# Altium PCB PCB1.PcbDoc
Units mil, origin at the board's own origin, x right, y up, seen from the top; angles counter-clockwise.
Board outline 6000 x 4000 mil, 2 copper layers (Top Layer, Bottom Layer); 60 components, 52 nets, 222 pads, 9 vias.
Unrouted connection lines stored in the file: 116.
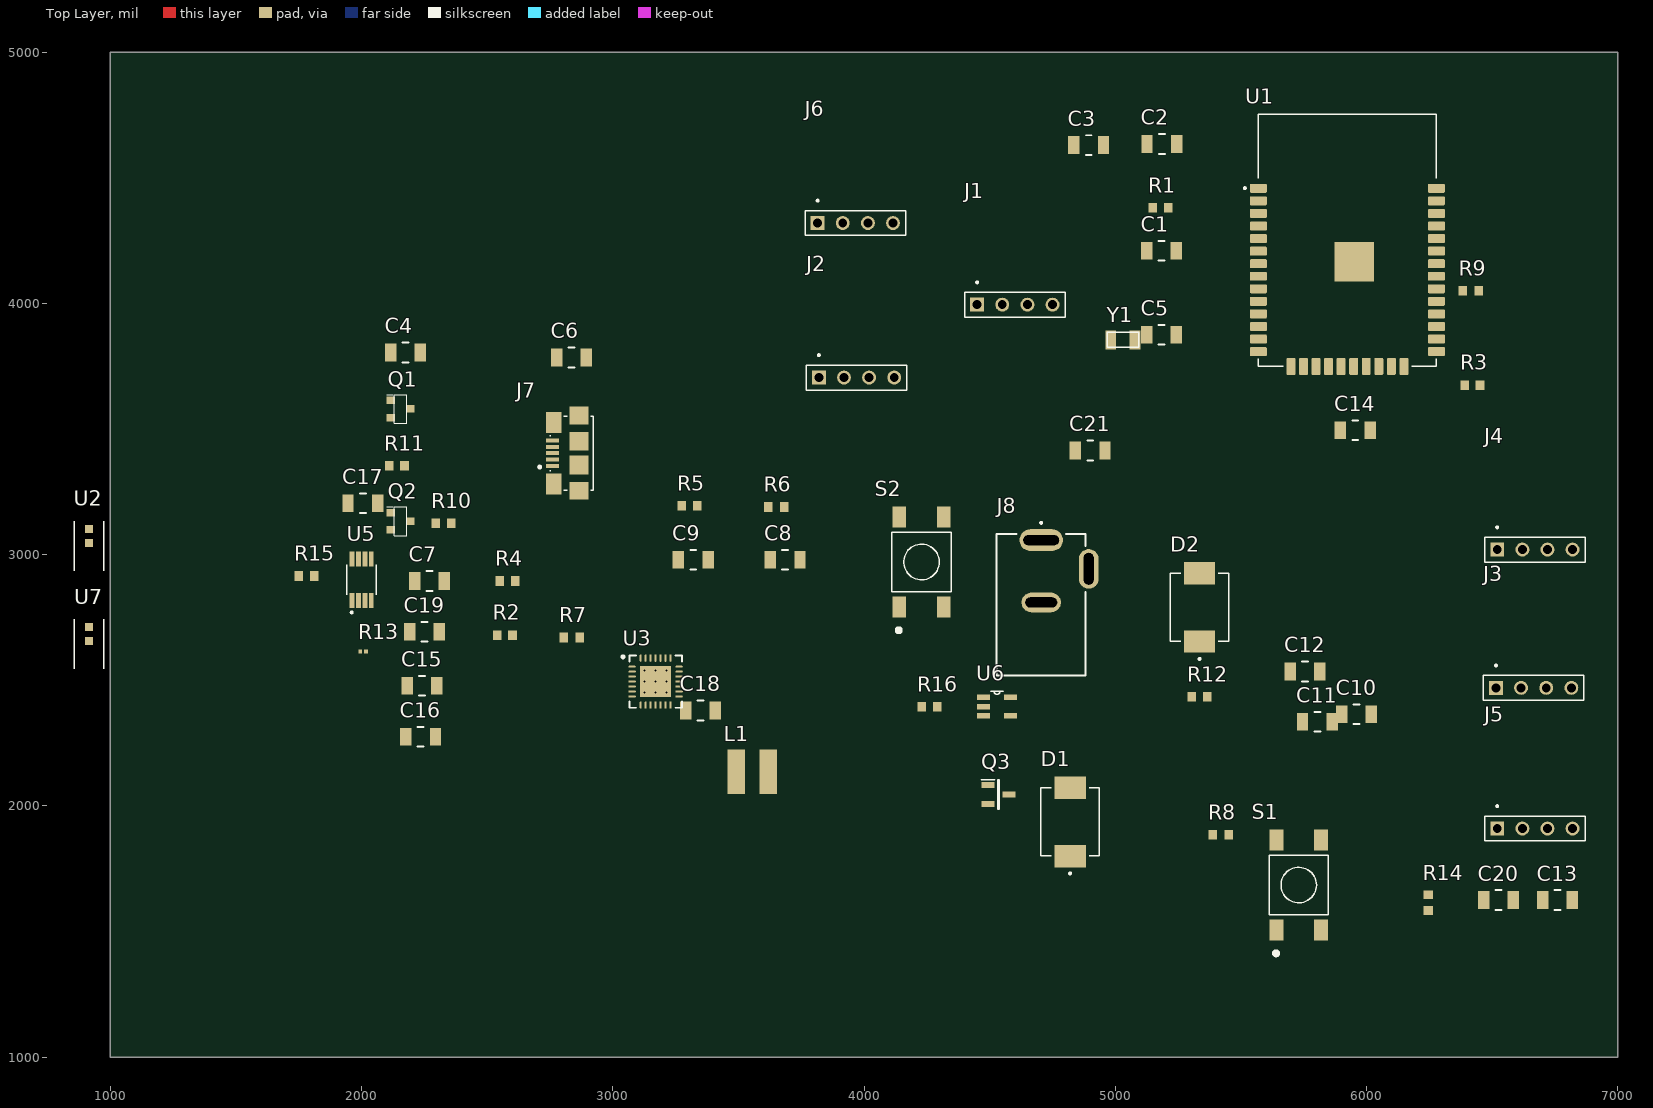
[diagram p0: Top Layer view]
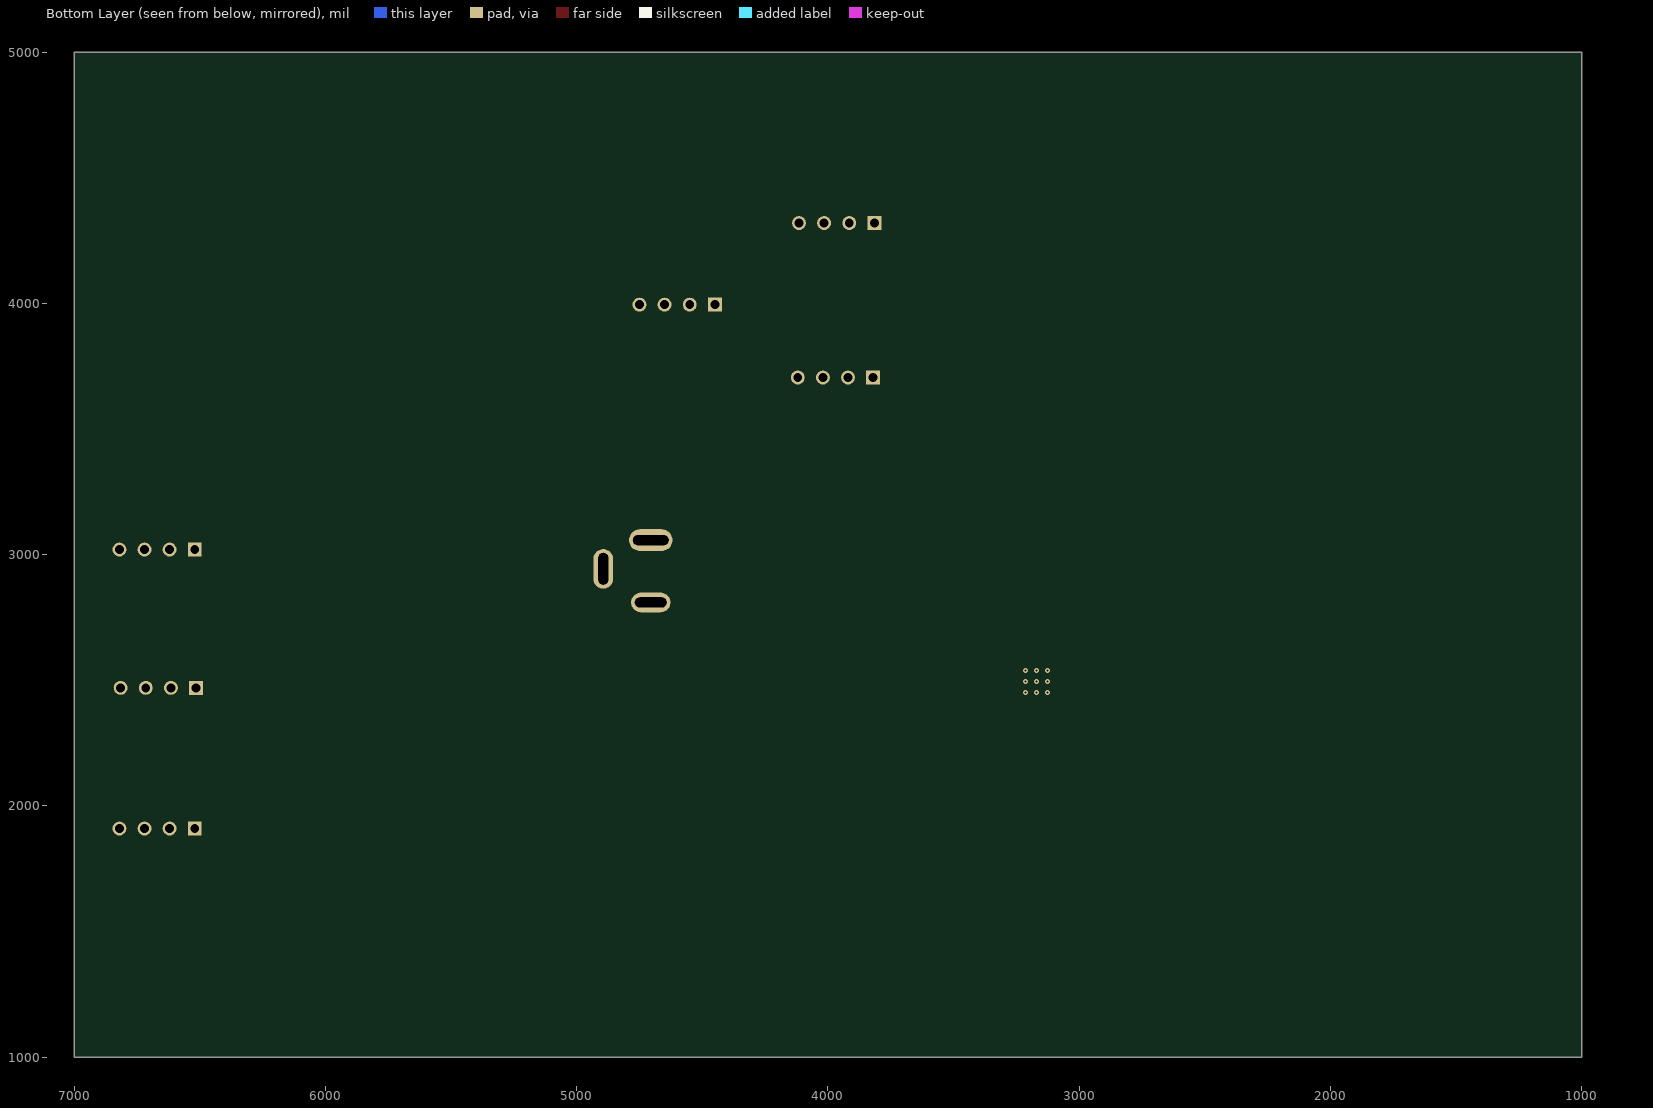
[diagram p1: Bottom Layer view, seen from below]

## Layer stack, top to bottom
Top Solder: solder mask 0.4, Solder Resist, Dk 3.5
Top Layer: signal copper 1.4
Dielectric 1: dielectric 12.6, FR-4, Dk 4.8
Bottom Layer: signal copper 1.4
Bottom Solder: solder mask 0.4, Solder Resist, Dk 3.5

## Board outline
1000,1000 7000,1000 7000,5000 1000,5000

## Design rules (kind name [scope] priority, off if disabled: settings)
Clearance [All] p1: gap=10 ignorepadtopadclearanceinfootprint=FALSE except(0: Arc-Hole Track-Hole SMDPad-Hole THPad-Hole Via-Hole Fill-Hole Poly-Hole Region-Hole Text-Hole)
PolygonConnect [All] p1: connectstyle=Relief reliefconductorwidth=10 reliefentries=4 polygonreliefangle="90 Angle" airgapwidth=10
RoomDefinition uARM [InComponentClass('uARM')] p1: confinementstyle=ConfineIn formatcopy=TRUE lockcomponents=FALSE outline 160,195 2160,195 2160,1195 160,1195
RoutingVias [All] p1: holewidth=28 width=50 viastyle="Through Hole" minholewidth=28 minwidth=50 maxholewidth=28 maxwidth=50
SolderMaskExpansion [All] p1: expansion=4 istentingtop=FALSE
Width [All] p1: maxlimit=10 minlimit=10 preferedwidth=10
30 further rules are at their usual default settings.

## Classes and differential pairs
component class uARM: C1 C2 C3 C4 C5 C6 C7 C8 C9 C10 C11 C12 C15 C16 C17 C18 C21 D1 D2 J1 J2 J3 J4 J5 J6 J7 J8 L1 Q1 Q2 Q3 R1 R2 R3 R4 R5 R6 R7 R8 R9 R10 R11 R12 R15 R16 S1 S2 U1 U2 U3 U7 Y1

## Components (designator, comment, footprint, x,y, rotation, side; value= is the part's Value field where it differs from the comment)
C1 "C1206C106K3RACTU" C_3216[1206]_N 5184.06,4210 r0 top value=10uF
C2 "C1206C106K3RACTU" C_3216[1206]_N 5185,4635 r0 top value=0.1uF
C3 "C1206C106K3RACTU" C_3216[1206]_N 4894.06,4630 r0 top value=10uF
C4 "C1206C106K3RACTU" C_3216[1206]_N 2175,3805 r0 top value=0.1uF
C5 "C1206C106K3RACTU" C_3216[1206]_N 5184.06,3875 r0 top value=27pF
C6 "C1206C106K3RACTU" C_3216[1206]_N 2835,3785 r0 top value=27pF
C7 "C1206C106K3RACTU" C_3216[1206]_N 2270,2895 r0 top value=0.1uF
C8 "C1206C106K3RACTU" C_3216[1206]_N 3685.94,2980 r0 top value=10uF
C9 "C1206C106K3RACTU" C_3216[1206]_N 3320,2980 r0 top value=1uF
C10 "C1206C106K3RACTU" C_3216[1206]_N 5960,2365 r0 top value=10uF
C11 "C1206C106K3RACTU" C_3216[1206]_N 5804.06,2335 r0 top value=1uF
C12 "C1206C106K3RACTU" C_3216[1206]_N 5755,2535 r0 top value=1uF
C13 "C1206C106K3RACTU" C_3216[1206]_N 6760,1625 r0 top value=0.1uF
C14 "C1206C106K3RACTU" C_3216[1206]_N 5955,3495 r0 top value=1uF
C15 "C1206C106K3RACTU" C_3216[1206]_N 2240,2478.19 r0 top value=10uF
C16 "C1206C106K3RACTU" C_3216[1206]_N 2235,2275 r0 top value=10uF
C17 "C1206C106K3RACTU" C_3216[1206]_N 2005,3205 r0 top value=0.1uF
C18 "C1206C106K3RACTU" C_3216[1206]_N 3349.06,2380 r0 top value=10uF
C19 "C1206C106K3RACTU" C_3216[1206]_N 2250,2693.19 r0 top value=10uF
C20 "C1206C106K3RACTU" C_3216[1206]_N 6525,1625 r0 top value=1uF
C21 "C1206C106K3RACTU" C_3216[1206]_N 4900,3415 r0 top value=0.1uF
D1 "SS34" DIOM7959X265N 4820,1936.02 r90 top
D2 "SS34" DIOM7959X265N 5335,2790 r90 top
J1 "215297-4" TE_215297-4 4600,3995 r0 top
J2 "215297-4" TE_215297-4 3970,3705 r0 top
J3 "215297-4" TE_215297-4 6665,2470 r0 top
J4 "215297-4" TE_215297-4 6670,3020 r0 top
J5 "215297-4" TE_215297-4 6670,1910 r0 top
J6 "215297-4" TE_215297-4 3965,4320 r0 top
J7 "10118192-0001LF" AMPHENOL_10118192-0001LF 2760,3403.82 r90 top
J8 "DCJ235-05-A-XX-X_REVA" GCT_DCJ235-05-A-XX-X_REVA 4705,2800 r0 top
L1 "744773122" WE-PD2-S 3555,2135 r0 top
Q1 "SS8050-G" MBTB-T-SOT23 2155,3580 r0 top
Q2 "SS8050-G" MBTB-T-SOT23 2155,3133.19 r0 top
Q3 "IRLM6402" SOT95P237X112-3N 4535,2045 r0 top
R1 "CRG0603F10K/10" RESC1608X55N#1 5180,4380 r0 top value=10K
R2 "CRG0603F10K/10" RESC1608X55N#1 2570,2680 r0 top value=10K
R3 "CRG0603F10K/10" RESC1608X55N#1 6420.71,3675 r0 top value=10K
R4 "CRG0603F10K/10" RESC1608X55N#1 2580.71,2895 r0 top value=10K
R5 "ERJ-S03F4700V" RESC1608X55N#2 3305,3195 r0 top value=470R
R6 "ERJ-S03F4700V" RESC1608X55N#2 3650,3190 r0 top value=470R
R7 "ERJ-S03F4700V" RESC1608X55N#2 2836.5,2670 r0 top value=470R
R8 "ERJ-S03F4700V" RESC1608X55N#2 5420,1885 r0 top value=470R
R9 "ERJ-S03F4700V" RESC1608X55N#2 6415,4050 r0 top value=470R
R10 "CRG0603F10K/10" RESC1608X55N#1 2325.71,3125 r0 top value=10K
R11 "CRG0603F10K/10" RESC1608X55N#1 2140,3353.19 r0 top value=10K
R12 "CRG0603F10K/10" RESC1608X55N#1 5335,2435 r0 top value=10K
R13 "ERJ-1GEF5232C" RESC0603X26N 2006.06,2615 r0 top value=52K3
R14 "ERJ-S03F4700V" RESC1608X55N#2 6245,1615 r90 top value=470R
R15 "CRG0603F10K/10" RESC1608X55N#1 1780,2915 r0 top value=10K
R16 "CRG0603F10K/10" RESC1608X55N#1 4260,2395 r0 top value=10K
S1 "5-1437565-0" SW_5-1437565-0 5730,1685 r90 top
S2 "5-1437565-0" SW_5-1437565-0 4228.58,2970.87 r90 top
U1 "ESP-WROOM-32" MODULE_ESP-WROOM-32 5923.66,4133.19 r0 top
U2 "SPMWHT541MP5WATMS4" LED_SPMWHT541MP5WAPKS4 915,3035 r90 top
U3 "CP2109-A01-GM" SLAB-QFN-28-3125x3125TP_L 3170,2495 r0 top
U5 "MCP16311T-E/MS" SOP65P490X110-8N 2000,2900 r90 top
U6 "MCP601T-E/OT" SOT95P270X145-5N 4529,2395 r0 top
U7 "SPMWHT541MP5WATMS4" LED_SPMWHT541MP5WAPKS4 915,2645 r90 top
Y1 "ABS07-32.768KHZ-9-1-T" XTAL320X150X90 5030,3855 r0 top

## Footprints (in the part's own frame and the unit in brackets; to place one, negate y for a bottom-side part, rotate by r counter-clockwise, add the part's x,y. Pads: shape width x height; smd on the part's side, far side on the other; paste and mask are expansions set on the pad)
AMPHENOL_10118192-0001LF [mm]
  rect 0.4x1.35 smd: 1(-1.3,0) 2(-0.65,0) 3(0,0) 4(0.65,0) 5(1.3,0)
  rect 2.1x1.6 smd: SH1(-3.1,-0.125) SH2(3.1,-0.125)
  rect 1.8x1.9 smd: SH3(-3.8,-2.675) SH6(3.8,-2.675)
  rect 1.9x1.9 smd: SH4(-1.2,-2.675) SH5(1.2,-2.675)
  silkscreen extent -3.75,-4.13 3.75,1.4, body extent -3.95,-2.41 3.95,3.21, height 2.7
C_3216[1206]_N [mm]
  rect 1.15x1.8 smd: 1(-1.5,0) 2(1.5,0)
  silkscreen extent -0.3,-1 0.3,1, body extent -1.6,-0.8 1.6,0.8, height 1
DIOM7959X265N [mm]
  rect 2.25x3.18 smd: A(3.455,0) C(-3.455,0)
  silkscreen extent -5.3,-2.95 3.44,2.95, body extent -3.98,-2.95 3.98,2.95, height 1.2
GCT_DCJ235-05-A-XX-X_REVA [mm]
  oval 4.4x2.2 hole 1 slot 3.6 at 0 deg: 1(0,6.55)
  oval 4x2 hole 1 slot 3.2 at 0 deg: 2(0,0.25)
  oval 2x4 hole 1 slot 3.2 at 90 deg: 3(4.8,3.65)
  silkscreen extent -4.5,-7.15 4.5,8.4
LED_SPMWHT541MP5WAPKS4 [mm]
  rect 0.8x0.8 smd paste-1 mask+0: A(1.7,0) C(0.3,0)
  silkscreen extent -2.5,-1.5 2.5,1.5, body extent -2.8,-1.5 2.8,1.5, height 0.8
MBTB-T-SOT23 [mm]
  rect 0.85x0.75 smd: 1(-1,0.875) 2(-1,-0.875) 3(1,0)
  silkscreen extent -1.38,-1.45 0.65,1.45
MODULE_ESP-WROOM-32 [mm]
  rrect22% 1.7x0.9 smd: 1(-9,8.255) 2(-9,6.985) 3(-9,5.715) 4(-9,4.445) 5(-9,3.175) 6(-9,1.905) 7(-9,0.635) 8(-9,-0.635) 9(-9,-1.905) 10(-9,-3.175) 11(-9,-4.445) 12(-9,-5.715) 13(-9,-6.985) 14(-9,-8.255) 25(9,-8.255) 26(9,-6.985) 27(9,-5.715) 28(9,-4.445) 29(9,-3.175) 30(9,-1.905) 31(9,-0.635) 32(9,0.635) 33(9,1.905) 34(9,3.175) 35(9,4.445) 36(9,5.715) 37(9,6.985) 38(9,8.255)
  rect 4x4 smd: 1.1(0.7,0.845)
  rrect22% 0.9x1.7 smd: 15(-5.715,-9.755) 16(-4.445,-9.755) 17(-3.175,-9.755) 18(-1.905,-9.755) 19(-0.635,-9.755) 20(0.635,-9.755) 21(1.905,-9.755) 22(3.175,-9.755) 23(4.445,-9.755) 24(5.715,-9.755)
  silkscreen extent -10.46,-9.75 9,15.75, body extent -9,-12.75 9,12.75, height 3.25
RESC0603X26N [mm]
  rect 0.38x0.4 smd: 1(-0.281,0) 2(0.281,0)
  body extent -0.3,-0.15 0.3,0.15, height 0.26
RESC1608X55N#1 [mm]
  rect 0.87x0.97 smd: 1(-0.78,0) 2(0.78,0)
  body extent -0.8,-0.4 0.8,0.4, height 0.55
RESC1608X55N#2 [mm]
  rect 0.87x0.98 smd: 1(-0.8,0) 2(0.8,0)
  body extent -0.8,-0.4 0.8,0.4, height 0.55
SLAB-QFN-28-3125x3125TP_L [mm] "QFN, 28-Leads, Body 5x5mm, Pitch 0.5mm, Thermal Pad 3.13x3.13mm, IPC High Density"
  oval 0.75x0.2 smd: 1(-2.375,1.5) 2(-2.375,1) 3(-2.375,0.5) 4(-2.375,0) 5(-2.375,-0.5) 6(-2.375,-1) 7(-2.375,-1.5) 15(2.375,-1.5) 16(2.375,-1) 17(2.375,-0.5) 18(2.375,0) 19(2.375,0.5) 20(2.375,1) 21(2.375,1.5)
  oval 0.2x0.75 smd: 8(-1.5,-2.375) 9(-1,-2.375) 10(-0.5,-2.375) 11(0,-2.375) 12(0.5,-2.375) 13(1,-2.375) 14(1.5,-2.375) 22(1.5,2.375) 23(1,2.375) 24(0.5,2.375) 25(0,2.375) 26(-0.5,2.375) 27(-1,2.375) 28(-1.5,2.375)
  rect 3.13x3.13 smd: 29(0,0)
  silkscreen extent -3.42,-2.65 2.65,2.65, body extent -2.5,-2.5 2.5,2.5, height 1
SOP65P490X110-8N [mm]
  rect 1.5x0.49 smd: 1(-2.105,0.975) 2(-2.105,0.325) 3(-2.105,-0.325) 4(-2.105,-0.975) 5(2.105,-0.975) 6(2.105,-0.325) 7(2.105,0.325) 8(2.105,0.975)
  silkscreen extent -3.4,-1.5 1.5,1.5
SOT95P237X112-3N [mm]
  rect 1.3x0.6 smd: 1(-1.05,0.95) 2(-1.05,-0.95) 3(1.05,0)
  silkscreen extent -1.7,-1.46 0.05,1.5, body extent -1.18,-1.46 1.18,1.46, height 1.12
SOT95P270X145-5N [mil]
  rect 52x22 smd: 1(-54,37) 2(-54,0) 3(-54,-37) 4(54,-37) 5(54,37)
  silkscreen extent -25,49 25,61, body extent -57,-53 57,53, height 57
SW_5-1437565-0 [mm]
  rect 2.1x1.4 smd: 1(-4.55,2.25) 2(4.55,2.25) 3(-4.55,-2.25) 4(4.55,-2.25)
  silkscreen extent -7.1,-3 3,3, body extent -3,-5 3,5, height 7.26
TE_215297-4 [mm]
  rect 1.408x1.408 hole 0.9: 1(-3.81,0)
  round 1.408 hole 0.9: 2(-1.27,0) 3(1.27,0) 4(3.81,0)
  silkscreen extent -5.08,-1.26 5.08,2.36, body extent -5.08,0 5.08,10, height 1.26
WE-PD2-S [mm] "SMD Inductor, 2-Leads, Body 4.5 x 4.0 mm"
  rect 1.75x4.5 smd: 1(-1.625,0) 2(1.625,0)
  body extent -2.23,-2 2.23,2, height 3.17
XTAL320X150X90 [mil]
  rect 43x75 smd: 1(-48,0) 2(48,0)
  silkscreen extent -63,-30 63,30, body extent -63,-30 63,30, height 35

## Part data
C1 C2 C3 C4 C5 C6 C7 C8 C9 C10 C11 C12 C13 C14 C15 C16 C17 C18 C19 C20 C21: library part C_10uf_3216[1206], "Capacitor Céramique 10uf XR7 25V 10%", Manufacturer=KEMET, Supplier Part Number 1=399-7442-1-ND, ManufacturerPartNumber=C1206C106K3RACTU, MountingType=SMT, Supplier 1=Digi-Key
D1 D2: "Diode Schottky 40V 3A 2-Pin SMC T/R", Package=None, Availability=Unavailable, MF="{'manufacturer': u'ON Semiconductor'}", MP=SS34, Price=None
J1 J2 J3 J4 J5 J6 R5 R6 R7 R8 R9 R14 U2 U6 U7: Package=None, Availability=Unavailable, Price=None
  J1 J2 J3 J4 J5 J6: MF="{'manufacturer': u'TE Connectivity'}", MP=215297-4
  R5 R6 R7 R8 R9 R14: MF="{'manufacturer': u'Panasonic'}", MP=ERJ-S03F4700V
  U2 U7: MF="{'manufacturer': u'Samsung Semiconductor,'}", MP=SPMWHT541MP5WATMS4
  U6: MF="{'manufacturer': u'Microchip'}", MP=MCP601T-E/OT
J7: "Single Port 5 Contact Horizontal Right Angle Shielded Micro B USB 2.0 Connector", Package=None, Availability=Unavailable, MF="{'manufacturer': u'FCI'}", MP=10118192-0001LF, Price=None
J8: "DC Power Jack, Thru-Hole, Horizontal, with Locating Pegs, D2.35mm", Package=None, Availability=Unavailable, MF="{'manufacturer': u'Global Connector Technology'}", MP=DCJ235-05-A-XX-X_REVA, Price=None
L1: "SMD Power Inductor WE-PD2, L = 22.0 µH", Inductance="22.0 µH", ComponentLink1Description="Manufacturer Link", ComponentLink1URL=http://www.we-online.com, ComponentLink2Description=Datasheet, ComponentLink2URL=http://www.we-online.de/katalog/media/pdf/744773122.pdf, DatasheetVersion="ver 1, Oct-2004", PackageDescription="SMD Inductor, 2-Leads, Body 4.5 x 4.0 mm", PackageReference=WE-PD2-S, PackageVersion=2004, PartNumber=744773122
Q1 Q2: "<b>Bipolar Transistors - BJT NPN TRANSISTOR 1.5A 40V</b><p> Source: <a href=\"https://componentsearchengine.com/Datasheets/1/SS8050-G.pdf\"> Datasheet </a>", Package=None, Availability=Unavailable, MF="{'manufacturer': u'Comchip Technology'}", MP=SS8050-G, Price=None
Q3: "MOSFET (P-Channel)", Manufacturer_Name=Infineon, Datasheet Link=https://www.kynix.com/Detail/613549/IRLM6402.html, Height=1.12mm, Manufacturer_Part_Number=IRLM6402
R1 R2 R3 R4 R10 R11 R12 R15 R16: "Thick Film Resistors - SMD CRG0603 1% 10K 10K RL", Package=None, Availability=Unavailable, MF="{'manufacturer': u'TE Connectivity'}", MP=CRG0603F10K/10, Price=None
R13: "Res Thick Film 0201 52.3K Ohm 1% 0.05W(1/20W) Â±200ppm/C SMD T/R", Package=None, Availability=Unavailable, MF="{'manufacturer': u'Panasonic'}", MP=ERJ-1GEF5232C, Price=None
S1 S2: "Switch Tactile OFF (ON) Round Button Gull Wing 0.05A 12VDC 1.57N SMD T/R", Package=None, Availability=Unavailable, MF="{'manufacturer': u'TE Connectivity'}", MP=5-1437565-0, Price=None
U1: "Module: combo; GPIO, I2C x2, I2S x2, SDIO, SPI x3, UART x3; 19.5dBm", Package=None, Availability=Unavailable, MF="{'manufacturer': u'Espressif Systems'}", MP=ESP-WROOM-32, Price=None
U3: "Single-Chip USB to UART Bridge, 1024 Bytes EEPROM, -40 to 85 degC, 28-pin QFN, Tube", Manufacturer="Silicon Labs", Code_IPC=J-STD-020C, Code_JEDEC=MO-220, ComponentLink1Description="Manufacturer URL", ComponentLink1URL=http://www.silabs.com/, ComponentLink2Description=Datasheet, ComponentLink2URL=http://www.silabs.com/Support%20Documents/TechnicalDocs/CP2102-9.pdf, ComponentLink3Description="Package Specification", ComponentLink3URL=http://www.silabs.com/Support%20Documents/TechnicalDocs/C8051T61x.pdf, DatasheetVersion="Rev. 1.5", EEPROM="1024 Bytes", Internal Oscillator=TRUE, Mounting Technology="Surface Mount", PackageDescription="28-Pin Quad-Flat No-Leads Package, Body 5 x 5 mm, Pitch 0.5 mm", PackageReference=QFN-28, PartNumber=CP2109-A01-GM, Sub-Family="USB Bridges"
U5: "The MCP16311/2 is a compact, high-efficiency, fixed frequency, synchronous step-down DC-DC converter in an 8-pin MSOP, or 2 x 3 TDFN package that operates from input voltage sources up to 30V. Integrated features include a high-side and a low-side switch, fixed frequency peak current mode control, internal compensation, peak current limit and overtemperature protection. The MCP16311/2 provides all the active functions for local DC-DC conversion, with fast transient response and accurate regulation.", Package=None, Availability=Unavailable, MF="{'manufacturer': u'Microchip Technology'}", MP=MCP16311T-E/MS, Price=None
Y1: "ABS07 Series 32.768 kHz Â±20 ppm 12.5 pF -40 to +85 C SMT Low Profile Crystal", Package=None, Availability=Unavailable, MF="{'manufacturer': u'Abracon'}", MP=ABS07-32.768KHZ-9-1-T, Price=None

## Via types
v1: diameter 19.68, hole 7.87, Top Layer to Bottom Layer, 9 vias

## Nets (pads, with @x,y where several pads share a name; then routed paths per layer and width w, separated by ;. In a path a pad name is that pad's centre, name@x,y a point inside that pad or via, vN(x,y) a via of type N, cw(c..) or ccw(c..) an arc to the next point about the centre after c; other vN are vias at no path point)
+5: C12.1 C13.2 C18.2 C19.2 C21.2 D1.C L1.2 Q3.2 R13.2 U6.5
ADC2_0/IO4: U1.26
D+: J7.3 U3.4
D-: J7.2 U3.5
DTR: Q2.3 R10.2 U3.28
EN: C4.2 Q1.2 R4.2 R8.2
GND: C1.1 C2.1 C3.2 C4.1 C5.1 C6.1 C7.1 C8.1 C9.1 C10.1 C11.1 C12.2 C13.1 C14.1 C15.1 C16.1 C18.1 C19.1 C20.2 C21.1 J1.4 J2.4 J3.4 J4.4 J5.4 J6.4 J7.5 J8.2 J8.3 R15.1 S1.3 S2.3 U1.1 U1.1.1 U1.15 U1.38 U3.3 U3.29 U5.5 U5.8
  other v1: 3126.69,2451.69 3170,2451.69 3213.31,2451.69 3126.69,2495 3170,2495 3213.31,2495 3126.69,2538.31 3170,2538.31 3213.31,2538.31
IO0: Q2.2 R2.2 R3.2 U1.25
IO2/DATA0: R3.1 U1.24
IO5: U1.29
IO12: U1.14
IO13: U1.16
IO14/CLK: U1.13
IO15/CMD: U1.23
IO16/U2RXD: U1.27
IO17/U2TXD: U1.28
IO18: R9.2 U1.30
IO19: U1.31
IO21/SDA: U1.33
IO22/SCL: U1.36
IO23: U1.37
IO25: U1.10
IO26: U1.11
IO27: U1.12
IO34: U1.6
IO35: U1.7
NetC3_1: C3.1 R1.1 U1.3
NetC5_2: C5.2 U1.9
NetC6_2: C6.2 Y1.2
NetC7_2: C7.2 R9.1 S2.1
NetC14_2: C14.2 U5.2
NetC17_1: C17.1 U5.7
NetC17_2: C17.2 L1.1 U5.6
NetD2_A: D2.A J8.1
NetQ1_1: Q1.1 R10.1
NetQ2_1: Q2.1 R11.1
NetQ3_1: Q3.1 U6.1
NetR7_2: R7.2
NetR8_1: R8.1 S1.1
NetR12_2: R12.2 R16.1 U6.3
NetR13_1: R13.1 R15.2 U5.1
NetR14_1: R14.1
NetR16_2: R16.2 U6.2
NetU1_8: U1.8 Y1.1
RTS: Q1.3 R11.2 U3.24
RXD: R5.1 U1.34
RXD_CP2109: R6.2 U3.25
TXD: R6.1 U1.35
TXD_CP2109: R5.2 U3.26
VCC: C8.2 C9.2 D1.A J1.1 J2.1 J3.1 J4.1 J5.1 J6.1 J7.1 Q3.3 U3.8
VDD33: C1.2 C2.2 C10.2 C11.2 C20.1 R1.2 R2.1 R4.1 R7.1 R14.2 U1.2 U3.6 U3.7 U6.4
VIN: C15.2 C16.2 D2.C R12.1 U5.3 U5.4
pads on no net: J1.2 J1.3 J2.2 J2.3 J3.2 J3.3 J4.2 J4.3 J5.2 J5.3 J6.2 J6.3 J7.4 J7.SH1 J7.SH2 J7.SH3 J7.SH4 J7.SH5 J7.SH6 S1.2 S1.4 S2.2 S2.4 U1.4 U1.5 U1.17 U1.18 U1.19 U1.20 U1.21 U1.22 U1.32 U2.A U2.C U3.1 U3.2 U3.9 U3.10 U3.11 U3.12 U3.13 U3.14 U3.15 U3.16 U3.17 U3.18 U3.19 U3.20 U3.21 U3.22 U3.23 U3.27 U7.A U7.C

## Text inside footprints (layer, text, board x,y; h text height)
J7: Mechanical 13 "PCB Edge" at 3036.34,3240.63 h32.03 r90